# EAGLE board keyswitch_matrixOnly (EAGLE 8.1.1)
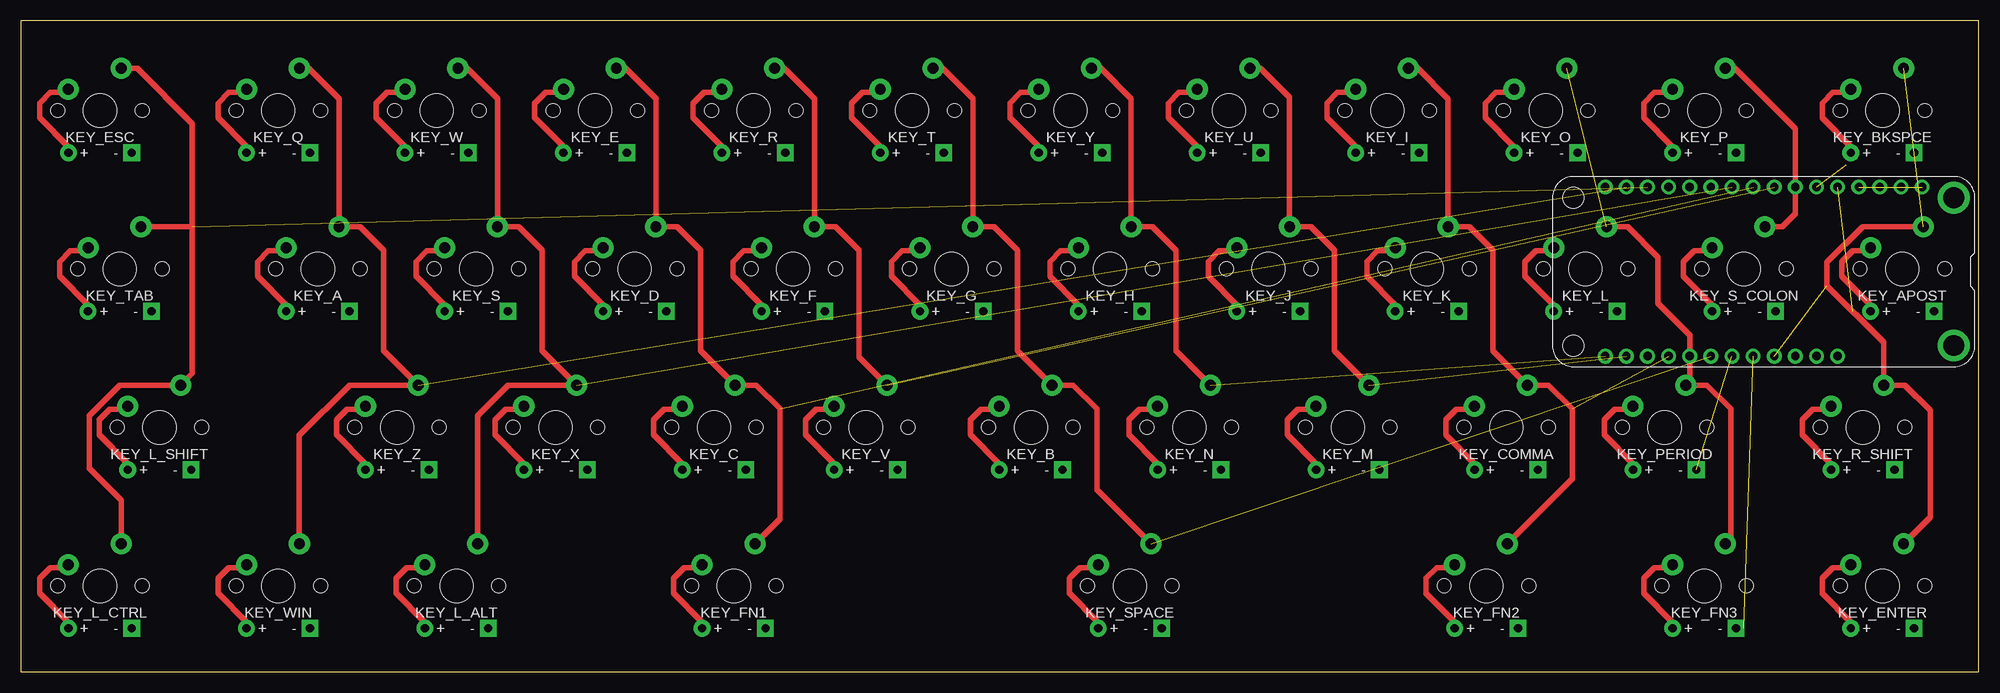
[diagram p0: board, top side]
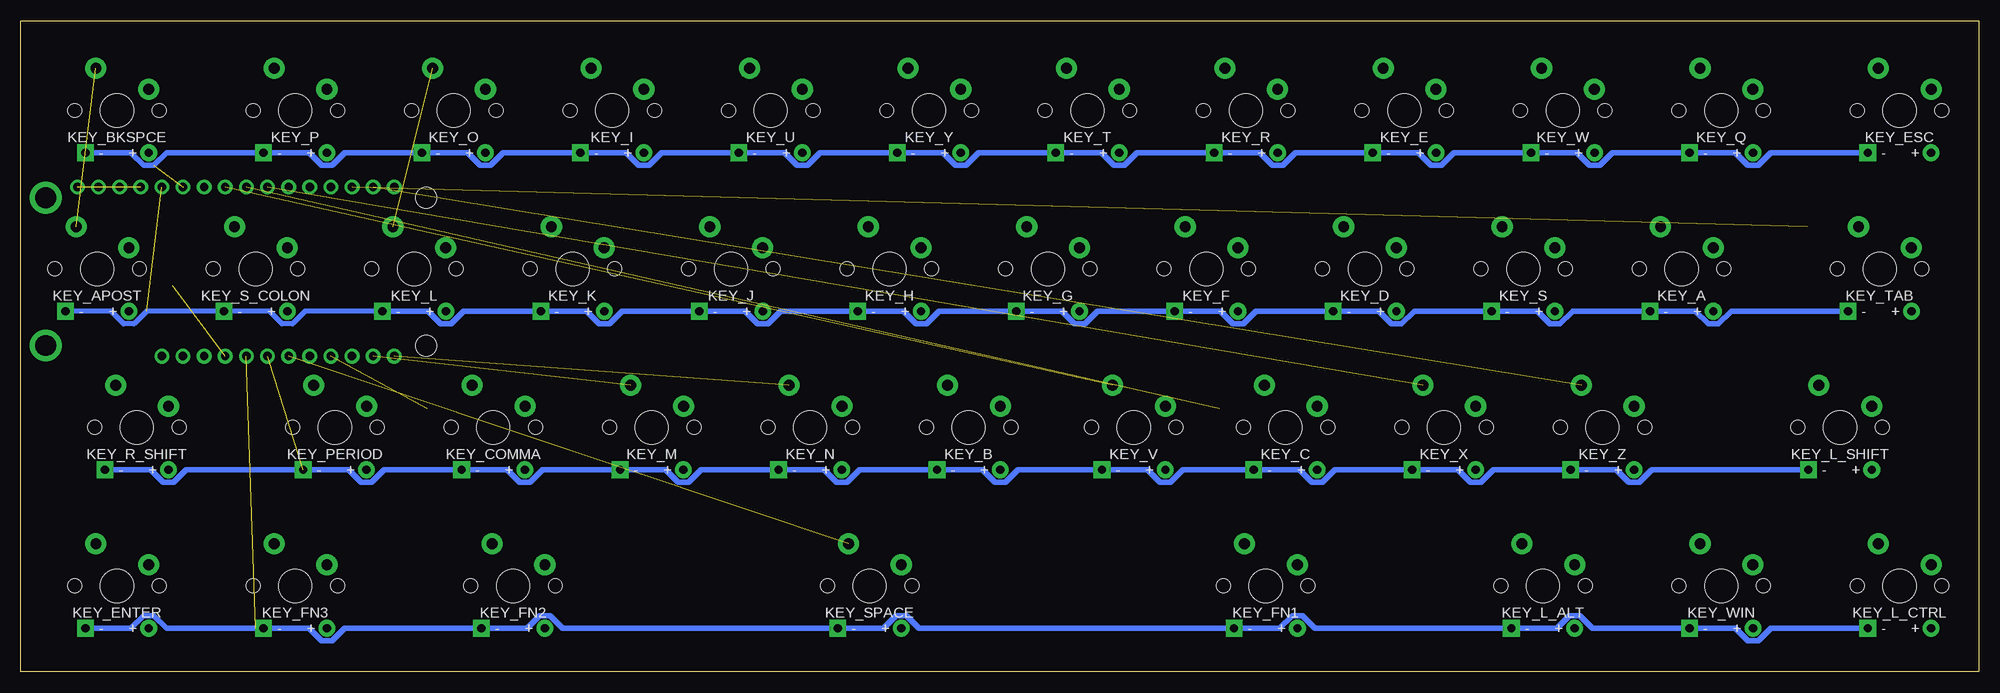
[diagram p1: board, bottom side, seen from below]

Size 235.41 x 78.25 mm. Coordinates in mm from the lower left corner, seen from the top.
Outline: 0,0 235.41,0 235.41,78.25 0,78.25 0,0
Copper layers (1*16): Top 0.035mm / dielectric 1.5mm / Bottom 0.035mm
Design rules "default": minimum track width 10mil, minimum drill 24mil, track to track 8mil, track to pad 8mil, pad to pad 8mil, via to via 8mil, smd to smd 8mil, copper to edge 40mil, drill to drill 8mil, minimum pad ring 10mil, minimum via ring 8mil, stop-mask expansion 4mil, vias tented up to drill 0mil, thermal gap 10mil
Net classes: 0 default: clearance 0.205 mm

## Footprints (pad centres in the part's own frame; a part is rotated, then mirrored left to right if it is on the bottom)
FEATHERWING_DIM = drill 1 pad 1.778: 1 6.35,1.27; 2 8.89,1.27; 3 11.43,1.27; 4 13.97,1.27; 5 16.51,1.27; 6 19.05,1.27; 7 21.59,1.27; 8 24.13,1.27; 9 26.67,1.27; 10 29.21,1.27; 11 31.75,1.27; 12 34.29,1.27; 13 36.83,1.27; 14 39.37,1.27; 15 41.91,1.27; 16 44.45,1.27; 17 44.45,21.59; 18 41.91,21.59; 19 39.37,21.59; 20 36.83,21.59; 21 34.29,21.59; 22 31.75,21.59; 23 29.21,21.59; 24 26.67,21.59; 25 24.13,21.59; 26 21.59,21.59; 27 19.05,21.59; 28 16.51,21.59 | drill 2.5 pad 3.81: P$1 2.54,20.32; P$2 2.54,2.54 | hole 2.54: 48.26,20.32; 48.26,2.54
MX-1U-DIODE = drill 1 pad 2: D+ -3.81,-5.08 | drill 1 pad 2 square: D- 3.81,-5.08 | drill 1.3 pad 2.54: MX1 -3.81,2.54; MX2 2.54,5.08 | hole 4: 0,0 | hole 1.7: -5.08,0; 5.08,0

## Placement (x,y rotation side)
FEATHER  FEATHERWING_NODIM  [FEATHERWING_DIM]  234.95,59.53 180 top
KEY_A  KEYSWITCH-DIODE-MX-1U-DIODE  [MX-1U-DIODE]  35.72,48.42 0 top
KEY_APOST  KEYSWITCH-DIODE-MX-1U-DIODE  [MX-1U-DIODE]  226.22,48.42 0 top
KEY_B  KEYSWITCH-DIODE-MX-1U-DIODE  [MX-1U-DIODE]  121.44,29.37 0 top
KEY_BKSPCE  KEYSWITCH-DIODE-MX-1U-DIODE  [MX-1U-DIODE]  223.84,67.47 0 top
KEY_C  KEYSWITCH-DIODE-MX-1U-DIODE  [MX-1U-DIODE]  83.34,29.37 0 top
KEY_COMMA  KEYSWITCH-DIODE-MX-1U-DIODE  [MX-1U-DIODE]  178.59,29.37 0 top
KEY_D  KEYSWITCH-DIODE-MX-1U-DIODE  [MX-1U-DIODE]  73.82,48.42 0 top
KEY_E  KEYSWITCH-DIODE-MX-1U-DIODE  [MX-1U-DIODE]  69.06,67.47 0 top
KEY_ENTER  KEYSWITCH-DIODE-MX-1U-DIODE  [MX-1U-DIODE]  223.84,10.32 0 top
KEY_ESC  KEYSWITCH-DIODE-MX-1U-DIODE  [MX-1U-DIODE]  9.53,67.47 0 top
KEY_F  KEYSWITCH-DIODE-MX-1U-DIODE  [MX-1U-DIODE]  92.87,48.42 0 top
KEY_FN1  KEYSWITCH-DIODE-MX-1U-DIODE  [MX-1U-DIODE]  85.73,10.32 0 top
KEY_FN2  KEYSWITCH-DIODE-MX-1U-DIODE  [MX-1U-DIODE]  176.21,10.32 0 top
KEY_FN3  KEYSWITCH-DIODE-MX-1U-DIODE  [MX-1U-DIODE]  202.41,10.32 0 top
KEY_G  KEYSWITCH-DIODE-MX-1U-DIODE  [MX-1U-DIODE]  111.92,48.42 0 top
KEY_H  KEYSWITCH-DIODE-MX-1U-DIODE  [MX-1U-DIODE]  130.97,48.42 0 top
KEY_I  KEYSWITCH-DIODE-MX-1U-DIODE  [MX-1U-DIODE]  164.31,67.47 0 top
KEY_J  KEYSWITCH-DIODE-MX-1U-DIODE  [MX-1U-DIODE]  150.02,48.42 0 top
KEY_K  KEYSWITCH-DIODE-MX-1U-DIODE  [MX-1U-DIODE]  169.07,48.42 0 top
KEY_L  KEYSWITCH-DIODE-MX-1U-DIODE  [MX-1U-DIODE]  188.12,48.42 0 top
KEY_L_ALT  KEYSWITCH-DIODE-MX-1U-DIODE  [MX-1U-DIODE]  52.39,10.32 0 top
KEY_L_CTRL  KEYSWITCH-DIODE-MX-1U-DIODE  [MX-1U-DIODE]  9.53,10.32 0 top
KEY_L_SHIFT  KEYSWITCH-DIODE-MX-1U-DIODE  [MX-1U-DIODE]  16.67,29.37 0 top
KEY_M  KEYSWITCH-DIODE-MX-1U-DIODE  [MX-1U-DIODE]  159.54,29.37 0 top
KEY_N  KEYSWITCH-DIODE-MX-1U-DIODE  [MX-1U-DIODE]  140.49,29.37 0 top
KEY_O  KEYSWITCH-DIODE-MX-1U-DIODE  [MX-1U-DIODE]  183.36,67.47 0 top
KEY_P  KEYSWITCH-DIODE-MX-1U-DIODE  [MX-1U-DIODE]  202.41,67.47 0 top
KEY_PERIOD  KEYSWITCH-DIODE-MX-1U-DIODE  [MX-1U-DIODE]  197.64,29.37 0 top
KEY_Q  KEYSWITCH-DIODE-MX-1U-DIODE  [MX-1U-DIODE]  30.96,67.47 0 top
KEY_R  KEYSWITCH-DIODE-MX-1U-DIODE  [MX-1U-DIODE]  88.11,67.47 0 top
KEY_R_SHIFT  KEYSWITCH-DIODE-MX-1U-DIODE  [MX-1U-DIODE]  221.46,29.37 0 top
KEY_S  KEYSWITCH-DIODE-MX-1U-DIODE  [MX-1U-DIODE]  54.77,48.42 0 top
KEY_S_COLON  KEYSWITCH-DIODE-MX-1U-DIODE  [MX-1U-DIODE]  207.17,48.42 0 top
KEY_SPACE  KEYSWITCH-DIODE-MX-1U-DIODE  [MX-1U-DIODE]  133.35,10.32 0 top
KEY_T  KEYSWITCH-DIODE-MX-1U-DIODE  [MX-1U-DIODE]  107.16,67.47 0 top
KEY_TAB  KEYSWITCH-DIODE-MX-1U-DIODE  [MX-1U-DIODE]  11.91,48.42 0 top
KEY_U  KEYSWITCH-DIODE-MX-1U-DIODE  [MX-1U-DIODE]  145.26,67.47 0 top
KEY_V  KEYSWITCH-DIODE-MX-1U-DIODE  [MX-1U-DIODE]  101.6,29.37 0 top
KEY_W  KEYSWITCH-DIODE-MX-1U-DIODE  [MX-1U-DIODE]  50.01,67.47 0 top
KEY_WIN  KEYSWITCH-DIODE-MX-1U-DIODE  [MX-1U-DIODE]  30.96,10.32 0 top
KEY_X  KEYSWITCH-DIODE-MX-1U-DIODE  [MX-1U-DIODE]  64.29,29.37 0 top
KEY_Y  KEYSWITCH-DIODE-MX-1U-DIODE  [MX-1U-DIODE]  126.21,67.47 0 top
KEY_Z  KEYSWITCH-DIODE-MX-1U-DIODE  [MX-1U-DIODE]  45.24,29.37 0 top

## Library data of the parts
FEATHER = adafruit
KEY_A KEY_APOST KEY_B KEY_BKSPCE KEY_C KEY_COMMA KEY_D KEY_E KEY_ENTER KEY_ESC KEY_F KEY_FN1-KEY_FN3 KEY_G KEY_H KEY_I KEY_J KEY_K KEY_L KEY_L_ALT KEY_L_CTRL KEY_L_SHIFT KEY_M KEY_N KEY_O KEY_P KEY_PERIOD KEY_Q KEY_R KEY_R_SHIFT KEY_S KEY_S_COLON KEY_SPACE KEY_T KEY_TAB KEY_U KEY_V KEY_W KEY_WIN KEY_X KEY_Y KEY_Z = Keyboard

## Nets
GND: FEATHER.1 FEATHER.4
N$1: KEY_ESC.D+ KEY_ESC.MX1
N$2: KEY_Q.D+ KEY_Q.MX1
N$3: KEY_W.D+ KEY_W.MX1
N$4: KEY_E.D+ KEY_E.MX1
N$5: KEY_R.D+ KEY_R.MX1
N$6: KEY_T.D+ KEY_T.MX1
N$7: KEY_Y.D+ KEY_Y.MX1
N$8: KEY_U.D+ KEY_U.MX1
N$9: KEY_I.D+ KEY_I.MX1
N$10: KEY_O.D+ KEY_O.MX1
N$11: KEY_P.D+ KEY_P.MX1
N$12: KEY_BKSPCE.D+ KEY_BKSPCE.MX1
N$13: KEY_TAB.D+ KEY_TAB.MX1
N$14: KEY_A.D+ KEY_A.MX1
N$15: KEY_S.D+ KEY_S.MX1
N$16: KEY_D.D+ KEY_D.MX1
N$17: KEY_F.D+ KEY_F.MX1
N$18: KEY_G.D+ KEY_G.MX1
N$19: KEY_H.D+ KEY_H.MX1
N$20: KEY_J.D+ KEY_J.MX1
N$21: KEY_K.D+ KEY_K.MX1
N$22: KEY_L.D+ KEY_L.MX1
N$23: KEY_S_COLON.D+ KEY_S_COLON.MX1
N$24: KEY_APOST.D+ KEY_APOST.MX1
N$25: KEY_L_SHIFT.D+ KEY_L_SHIFT.MX1
N$26: KEY_Z.D+ KEY_Z.MX1
N$27: KEY_X.D+ KEY_X.MX1
N$28: KEY_C.D+ KEY_C.MX1
N$29: KEY_V.D+ KEY_V.MX1
N$30: KEY_B.D+ KEY_B.MX1
N$31: KEY_N.D+ KEY_N.MX1
N$32: KEY_M.D+ KEY_M.MX1
N$33: KEY_COMMA.D+ KEY_COMMA.MX1
N$34: KEY_PERIOD.D+ KEY_PERIOD.MX1
N$35: FEATHER.9 KEY_C.MX2 KEY_D.MX2 KEY_E.MX2 KEY_FN1.MX2
N$36: KEY_R_SHIFT.D+ KEY_R_SHIFT.MX1
N$37: KEY_WIN.D+ KEY_WIN.MX1
N$38: KEY_L_ALT.D+ KEY_L_ALT.MX1
N$39: KEY_FN1.D+ KEY_FN1.MX1
N$41: KEY_SPACE.D+ KEY_SPACE.MX1
N$42: FEATHER.15 KEY_A.MX2 KEY_Q.MX2 KEY_WIN.MX2 KEY_Z.MX2
N$43: FEATHER.10 KEY_L_ALT.MX2 KEY_S.MX2 KEY_W.MX2 KEY_X.MX2
N$44: KEY_FN2.D+ KEY_FN2.MX1
N$45: KEY_FN3.D+ KEY_FN3.MX1
N$46: FEATHER.22 KEY_B.MX2 KEY_G.MX2 KEY_SPACE.MX2 KEY_T.MX2
N$47: KEY_ENTER.D+ KEY_ENTER.MX1
N$49: FEATHER.8 KEY_F.MX2 KEY_R.MX2 KEY_V.MX2
N$50: FEATHER.24 KEY_ENTER.D- KEY_FN1.D- KEY_FN2.D- KEY_FN3.D- KEY_L_ALT.D- KEY_L_CTRL.D- KEY_SPACE.D- KEY_WIN.D-
N$51: FEATHER.17 KEY_H.MX2 KEY_N.MX2 KEY_Y.MX2
N$52: FEATHER.21 KEY_FN3.MX2 KEY_L.MX2 KEY_O.MX2 KEY_PERIOD.MX2
N$53: FEATHER.20 KEY_COMMA.MX2 KEY_FN2.MX2 KEY_I.MX2 KEY_K.MX2
N$54: FEATHER.18 KEY_J.MX2 KEY_M.MX2 KEY_U.MX2
N$55: FEATHER.7 KEY_P.MX2 KEY_S_COLON.MX2
N$56: FEATHER.25 KEY_APOST.MX2 KEY_BKSPCE.MX2 KEY_ENTER.MX2 KEY_R_SHIFT.MX2
N$57: FEATHER.6 KEY_BKSPCE.D- KEY_E.D- KEY_ESC.D- KEY_I.D- KEY_O.D- KEY_P.D- KEY_Q.D- KEY_R.D- KEY_T.D- KEY_U.D- KEY_W.D- KEY_Y.D-
N$58: FEATHER.14 KEY_ESC.MX2 KEY_L_CTRL.MX2 KEY_L_SHIFT.MX2 KEY_TAB.MX2
N$59: FEATHER.23 KEY_B.D- KEY_C.D- KEY_COMMA.D- KEY_L_SHIFT.D- KEY_M.D- KEY_N.D- KEY_PERIOD.D- KEY_R_SHIFT.D- KEY_V.D- KEY_X.D- KEY_Z.D-
N$60: KEY_L_CTRL.D+ KEY_L_CTRL.MX1
N$72: FEATHER.5 KEY_A.D- KEY_APOST.D- KEY_D.D- KEY_F.D- KEY_G.D- KEY_H.D- KEY_J.D- KEY_K.D- KEY_L.D- KEY_S.D- KEY_S_COLON.D- KEY_TAB.D-

## Tracks (layer width: path | path; a pad name or v marks a point on that pad's centre or on a via)
GND  (1 unrouted)
N$1
  Top 0.635: KEY_ESC.MX1 5.35,69.64 3.55,69.64 2.27,68.37 2.27,66.57 5.71,63.13 KEY_ESC.D+
N$2
  Top 0.635: KEY_Q.MX1 26.78,69.64 24.98,69.64 23.7,68.37 23.7,66.57 27.15,63.13 KEY_Q.D+
N$3
  Top 0.635: KEY_W.MX1 45.83,69.64 44.03,69.64 42.75,68.37 42.75,66.57 46.2,63.13 KEY_W.D+
N$4
  Top 0.635: KEY_E.MX1 64.88,69.64 63.08,69.64 61.8,68.37 61.8,66.57 65.25,63.13 KEY_E.D+
N$5
  Top 0.635: KEY_R.MX1 83.93,69.64 82.13,69.64 80.86,68.37 80.86,66.57 84.3,63.13 KEY_R.D+
N$6
  Top 0.635: KEY_T.MX1 102.98,69.64 101.18,69.64 99.91,68.37 99.91,66.57 103.35,63.13 KEY_T.D+
N$7
  Top 0.635: KEY_Y.MX1 122.03,69.64 120.23,69.64 118.96,68.37 118.96,66.57 122.4,63.13 KEY_Y.D+
N$8
  Top 0.635: KEY_U.MX1 141.08,69.64 139.28,69.64 138,68.37 138,66.57 141.45,63.13 KEY_U.D+
N$9
  Top 0.635: KEY_I.MX1 160.13,69.64 158.33,69.64 157.06,68.37 157.06,66.57 160.5,63.13 KEY_I.D+
N$10
  Top 0.635: KEY_O.MX1 179.18,69.64 177.38,69.64 176.11,68.37 176.11,66.57 179.55,63.13 KEY_O.D+
N$11
  Top 0.635: KEY_P.MX1 198.23,69.64 196.43,69.64 195.16,68.37 195.16,66.57 198.6,63.13 KEY_P.D+
N$12
  Top 0.635: KEY_BKSPCE.MX1 219.66,69.64 217.86,69.64 216.59,68.37 216.59,66.57 220.03,63.13 KEY_BKSPCE.D+
N$13
  Top 0.635: KEY_TAB.MX1 7.73,50.59 5.93,50.59 4.66,49.32 4.66,47.52 8.1,44.08 KEY_TAB.D+
N$14
  Top 0.635: KEY_A.MX1 31.54,50.59 29.74,50.59 28.47,49.32 28.47,47.52 31.91,44.08 KEY_A.D+
N$15
  Top 0.635: KEY_S.MX1 50.59,50.59 48.79,50.59 47.52,49.32 47.52,47.52 50.96,44.08 KEY_S.D+
N$16
  Top 0.635: KEY_D.MX1 69.64,50.59 67.84,50.59 66.57,49.32 66.57,47.52 70.01,44.08 KEY_D.D+
N$17
  Top 0.635: KEY_F.MX1 88.69,50.59 86.89,50.59 85.62,49.32 85.62,47.52 89.06,44.08 KEY_F.D+
N$18
  Top 0.635: KEY_G.MX1 107.74,50.59 105.94,50.59 104.67,49.32 104.67,47.52 108.11,44.08 KEY_G.D+
N$19
  Top 0.635: KEY_H.MX1 126.79,50.59 124.99,50.59 123.72,49.32 123.72,47.52 127.16,44.08 KEY_H.D+
N$20
  Top 0.635: KEY_J.MX1 145.84,50.59 144.04,50.59 142.77,49.32 142.77,47.52 146.21,44.08 KEY_J.D+
N$21
  Top 0.635: KEY_K.MX1 164.89,50.59 163.09,50.59 161.82,49.32 161.82,47.52 165.26,44.08 KEY_K.D+
N$22
  Top 0.635: KEY_L.MX1 183.94,50.59 182.14,50.59 180.87,49.32 180.87,47.52 184.31,44.08 KEY_L.D+
N$23
  Top 0.635: KEY_S_COLON.MX1 202.99,50.59 201.19,50.59 199.92,49.32 199.92,47.52 203.36,44.08 KEY_S_COLON.D+
N$24
  Top 0.635: KEY_APOST.MX1 222.04,50.59 220.24,50.59 218.97,49.32 218.97,47.52 222.41,44.08 KEY_APOST.D+
N$25
  Top 0.635: KEY_L_SHIFT.MX1 12.49,31.54 10.69,31.54 9.42,30.27 9.42,28.47 12.86,25.03 KEY_L_SHIFT.D+
N$26
  Top 0.635: KEY_Z.MX1 41.06,31.54 39.27,31.54 37.99,30.27 37.99,28.47 41.43,25.03 KEY_Z.D+
N$27
  Top 0.635: KEY_X.MX1 60.12,31.54 58.31,31.54 57.04,30.27 57.04,28.47 60.48,25.03 KEY_X.D+
N$28
  Top 0.635: KEY_C.MX1 79.17,31.54 77.37,31.54 76.09,30.27 76.09,28.47 79.53,25.03 KEY_C.D+
N$29
  Top 0.635: KEY_V.MX1 97.42,31.54 95.62,31.54 94.35,30.27 94.35,28.47 97.79,25.03 KEY_V.D+
N$30
  Top 0.635: KEY_B.MX1 117.27,31.54 115.47,31.54 114.19,30.27 114.19,28.47 117.63,25.03 KEY_B.D+
N$31
  Top 0.635: KEY_N.MX1 136.31,31.54 134.51,31.54 133.24,30.27 133.24,28.47 136.68,25.03 KEY_N.D+
N$32
  Top 0.635: KEY_M.MX1 155.37,31.54 153.56,31.54 152.29,30.27 152.29,28.47 155.73,25.03 KEY_M.D+
N$33
  Top 0.635: KEY_COMMA.MX1 174.41,31.54 172.62,31.54 171.34,30.27 171.34,28.47 174.78,25.03 KEY_COMMA.D+
N$34
  Top 0.635: KEY_PERIOD.MX1 193.47,31.54 191.66,31.54 190.39,30.27 190.39,28.47 193.83,25.03 KEY_PERIOD.D+
N$35  (1 unrouted)
  Top 0.635: KEY_E.MX2 72.71,72.55 76.36,68.9 KEY_D.MX2 78.9,53.5 81.76,50.64 81.76,38.58 KEY_C.MX2 88.42,34.45 91.28,31.59 91.28,18.41 KEY_FN1.MX2
N$36
  Top 0.635: KEY_R_SHIFT.MX1 217.28,31.54 215.48,31.54 214.21,30.27 214.21,28.47 217.65,25.03 KEY_R_SHIFT.D+
N$37
  Top 0.635: KEY_WIN.MX1 26.78,12.49 24.98,12.49 23.7,11.22 23.7,9.42 27.15,5.98 KEY_WIN.D+
N$38
  Top 0.635: KEY_L_ALT.MX1 48.21,12.49 46.41,12.49 45.14,11.22 45.14,9.42 48.58,5.98 KEY_L_ALT.D+
N$39
  Top 0.635: KEY_FN1.MX1 81.55,12.49 79.75,12.49 78.47,11.22 78.47,9.42 81.92,5.98 KEY_FN1.D+
N$41
  Top 0.635: KEY_SPACE.MX1 129.17,12.49 127.37,12.49 126.1,11.22 126.1,9.42 129.54,5.98 KEY_SPACE.D+
N$42  (1 unrouted)
  Top 0.635: KEY_Q.MX2 34.61,72.55 38.26,68.9 KEY_A.MX2 40.8,53.5 43.66,50.64 43.66,38.58 KEY_Z.MX2 39.53,34.45 33.5,28.42 KEY_WIN.MX2
N$43  (1 unrouted)
  Top 0.635: KEY_W.MX2 53.66,72.55 57.31,68.9 KEY_S.MX2 59.85,53.5 62.71,50.64 62.71,38.58 KEY_X.MX2 58.58,34.45 54.93,30.8 KEY_L_ALT.MX2
N$44
  Top 0.635: KEY_FN2.MX1 172.03,12.49 170.23,12.49 168.96,11.22 168.96,9.42 172.4,5.98 KEY_FN2.D+
N$45
  Top 0.635: KEY_FN3.MX1 198.23,12.49 196.43,12.49 195.16,11.22 195.16,9.42 198.6,5.98 KEY_FN3.D+
N$46  (1 unrouted)
  Top 0.635: KEY_T.MX2 110.81,72.55 114.46,68.9 KEY_G.MX2 117,53.5 119.86,50.64 119.86,38.58 KEY_B.MX2 126.52,34.45 129.38,31.59 129.38,21.91 KEY_SPACE.MX2
N$47
  Top 0.635: KEY_ENTER.MX1 219.66,12.49 217.86,12.49 216.59,11.22 216.59,9.42 220.03,5.98 KEY_ENTER.D+
N$49  (1 unrouted)
  Top 0.635: KEY_R.MX2 91.76,72.55 95.41,68.9 KEY_F.MX2 97.95,53.5 100.81,50.64 100.81,37.78 KEY_V.MX2
N$50  (1 unrouted)
  Bottom 0.635: KEY_ENTER.D- 222.16,5.24 220.65,6.75 219.4,6.75 217.89,5.24 207.17,5.24 | 207.17,5.24 KEY_FN3.D- | KEY_L_CTRL.D- 25.01,5.24 26.52,3.73 27.77,3.73 29.28,5.24 KEY_WIN.D- 46.44,5.24 47.95,6.75 49.2,6.75 50.71,5.24 KEY_L_ALT.D- 79.78,5.24 81.29,6.75 82.54,6.75 84.05,5.24 KEY_FN1.D- 127.41,5.24 128.91,6.75 130.16,6.75 131.68,5.24 KEY_SPACE.D- 170.27,5.24 171.78,6.75 173.03,6.75 174.54,5.24 KEY_FN2.D- 196.44,5.24 197.97,3.72 199.23,3.72 200.75,5.24 207.17,5.24
N$51  (1 unrouted)
  Top 0.635: KEY_Y.MX2 129.86,72.55 133.51,68.9 KEY_H.MX2 136.05,53.5 138.91,50.64 138.91,38.58 KEY_N.MX2
N$52  (1 unrouted)
  Top 0.635: KEY_L.MX2 193.2,53.5 196.85,49.85 196.85,44.29 200.66,40.48 FEATHER.21 200.66,34.92 KEY_PERIOD.MX2 202.72,34.45 205.58,31.59 205.58,16.03 KEY_FN3.MX2
N$53  (1 unrouted)
  Top 0.635: KEY_I.MX2 167.96,72.55 171.61,68.9 KEY_K.MX2 174.15,53.5 177.01,50.64 177.01,38.58 KEY_COMMA.MX2 183.67,34.45 186.53,31.59 186.53,23.18 KEY_FN2.MX2
N$54  (1 unrouted)
  Top 0.635: KEY_U.MX2 149.07,72.55 152.56,69.06 KEY_J.MX2 155.1,53.5 157.96,50.64 157.96,38.58 KEY_M.MX2
N$55
  Top 0.635: KEY_P.MX2 206.06,72.55 213.36,65.25 FEATHER.7 213.36,55.09 211.77,53.5 KEY_S_COLON.MX2
N$56  (2 unrouted)
  Top 0.635: KEY_APOST.MX2 221.46,53.5 217.17,49.21 217.17,46.42 224,39.6 KEY_R_SHIFT.MX2 226.54,34.45 229.55,31.43 229.55,18.57 KEY_ENTER.MX2
N$57  (1 unrouted)
  Bottom 0.635: KEY_ESC.D- 25.01,62.39 26.52,60.88 27.77,60.88 29.28,62.39 KEY_Q.D- 44.06,62.39 45.57,60.88 46.82,60.88 48.33,62.39 KEY_W.D- 63.11,62.39 64.62,60.88 65.87,60.88 67.38,62.39 KEY_E.D- 82.16,62.39 83.67,60.88 84.92,60.88 86.43,62.39 KEY_R.D- 101.21,62.39 102.72,60.88 103.97,60.88 105.48,62.39 KEY_T.D- 120.26,62.39 121.77,60.88 123.02,60.88 124.53,62.39 KEY_Y.D- 139.31,62.39 140.82,60.88 142.07,60.88 143.58,62.39 KEY_U.D- 158.36,62.39 159.87,60.88 161.12,60.88 162.63,62.39 KEY_I.D- 177.41,62.39 178.92,60.88 180.17,60.88 181.68,62.39 KEY_O.D- 196.46,62.39 197.97,60.88 199.22,60.88 200.73,62.39 KEY_P.D- 217.89,62.39 219.4,60.88 220.65,60.88 222.16,62.39 KEY_BKSPCE.D-
N$58  (1 unrouted)
  Top 0.635: KEY_L_CTRL.MX2 12.07,20.64 8.26,24.45 8.26,30.8 11.91,34.45 KEY_L_SHIFT.MX2 20.64,35.88 20.64,53.5 | KEY_ESC.MX2 13.97,72.55 20.64,65.88 20.64,53.5 | KEY_TAB.MX2 20.64,53.5
N$59  (1 unrouted)
  Bottom 0.635: KEY_L_SHIFT.D- 39.3,24.29 40.81,22.78 42.06,22.78 43.57,24.29 KEY_Z.D- 58.35,24.29 59.86,22.78 61.11,22.78 62.62,24.29 KEY_X.D- 77.4,24.29 78.91,22.78 80.16,22.78 81.67,24.29 KEY_C.D- 95.66,24.29 97.17,22.78 98.42,22.78 99.93,24.29 KEY_V.D- 115.5,24.29 117.01,22.78 118.26,22.78 119.77,24.29 KEY_B.D- 134.55,24.29 136.06,22.78 137.31,22.78 138.82,24.29 KEY_N.D- 153.6,24.29 155.11,22.78 156.36,22.78 157.87,24.29 KEY_M.D- 172.65,24.29 174.16,22.78 175.41,22.78 176.92,24.29 KEY_COMMA.D- 191.7,24.29 193.21,22.78 194.46,22.78 195.97,24.29 KEY_PERIOD.D- 215.51,24.29 217.02,22.78 218.27,22.78 219.78,24.29 KEY_R_SHIFT.D-
N$60
  Top 0.635: KEY_L_CTRL.MX1 5.35,12.49 3.55,12.49 2.27,11.22 2.27,9.42 5.71,5.98 KEY_L_CTRL.D+
N$72  (1 unrouted)
  Bottom 0.61: KEY_L.D- 201.22,43.34 202.73,41.83 203.98,41.83 205.49,43.34 KEY_S_COLON.D- 220.27,43.34 221.78,41.83 223.03,41.83 224.54,43.34 KEY_APOST.D-
  Bottom 0.635: KEY_TAB.D- 29.77,43.34 31.28,41.83 32.53,41.83 34.04,43.34 KEY_A.D- 48.82,43.34 50.33,41.83 51.58,41.83 53.09,43.34 KEY_S.D- 67.87,43.34 69.38,41.83 70.63,41.83 72.14,43.34 KEY_D.D- 86.92,43.34 88.43,41.83 89.68,41.83 91.19,43.34 KEY_F.D- 105.97,43.34 107.48,41.83 108.73,41.83 110.24,43.34 KEY_G.D- 125.02,43.34 126.53,41.83 127.78,41.83 129.29,43.34 KEY_H.D- 144.07,43.34 145.58,41.83 146.83,41.83 148.34,43.34 KEY_J.D- 163.12,43.34 164.63,41.83 165.88,41.83 167.39,43.34 KEY_K.D- 182.17,43.34 183.68,41.83 184.93,41.83 186.44,43.34 KEY_L.D-